# Altium PCB syspcb.PcbDoc (part 2 of 2)
Units mm, origin at the board's own origin, x right, y up, seen from the top; angles counter-clockwise.
Board outline 95.88 x 90.17 mm, 4 copper layers (TOP, GND, VCC, BOT), stack 0.778 mm thick; 67 components, 76 nets, 283 pads, 156 vias.
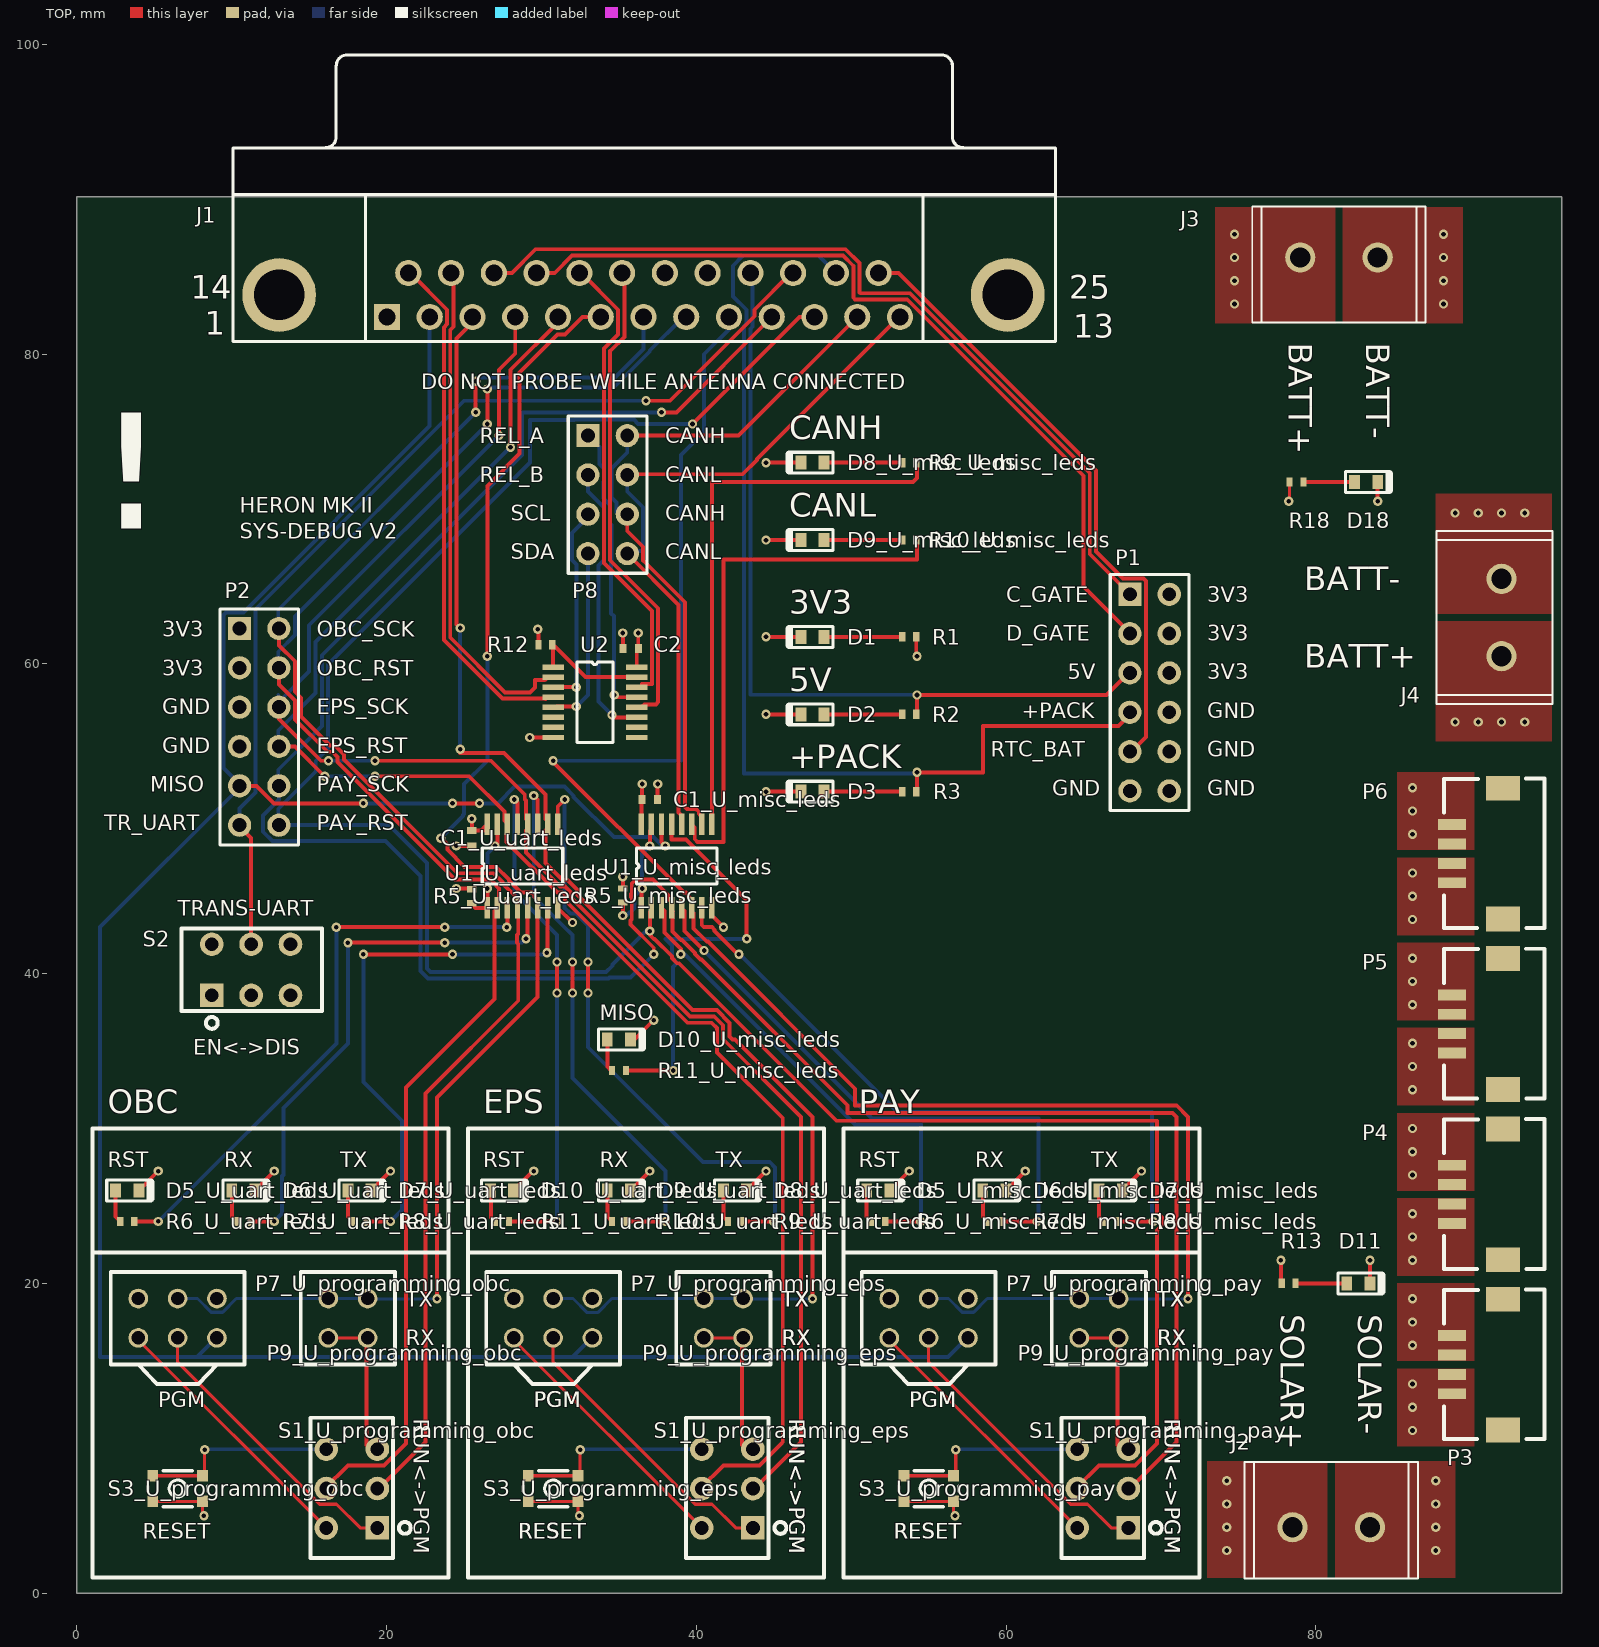
[diagram p0: TOP view]

## Silkscreen, mask and mechanical layers (free items; w line width, h text height) (continued)
Top Overlay: (continued)
  text "RX" at 45.5,15.998 h1
  text "RX" at 69.75,16 h1
  text "RX" at 69.75,16 h1
  text "RX" at 69.75,16 h1
  text "RX" at 69.75,16 h1
  text "PGM" at 5.25,12 h1
  text "PGM" at 29.5,11.998 h1
  text "PGM" at 29.5,11.998 h1
  text "PGM" at 29.5,11.998 h1
  text "PGM" at 29.5,11.998 h1
  text "PGM" at 29.5,11.998 h1
  text "PGM" at 53.75,12 h1
  text "PGM" at 53.75,12 h1
  text "PGM" at 53.75,12 h1
  text "PGM" at 53.75,12 h1
  text "RUN<->PGM" at 21.75,11.25 h1 r270
  text "RUN<->PGM" at 46,11.248 h1 r270
  text "RUN<->PGM" at 46,11.248 h1 r270
  text "RUN<->PGM" at 46,11.248 h1 r270
  text "RUN<->PGM" at 46,11.248 h1 r270
  text "RUN<->PGM" at 46,11.248 h1 r270
  text "RUN<->PGM" at 70.25,11.25 h1 r270
  text "RUN<->PGM" at 70.25,11.25 h1 r270
  text "RUN<->PGM" at 70.25,11.25 h1 r270
  text "RUN<->PGM" at 70.25,11.25 h1 r270
  text "RESET" at 4.25,3.5 h1
  text "RESET" at 28.5,3.498 h1
  text "RESET" at 28.5,3.498 h1
  text "RESET" at 28.5,3.498 h1
  text "RESET" at 28.5,3.498 h1
  text "RESET" at 28.5,3.498 h1
  text "RESET" at 52.75,3.5 h1
  text "RESET" at 52.75,3.5 h1
  text "RESET" at 52.75,3.5 h1
  text "RESET" at 52.75,3.5 h1
Route Tool Path:
  lines w0.254: 0,0 0,90.229 95.86,90.229 95.86,0 0,0

## Text inside footprints (layer, text, board x,y; h text height)
J1: Top Overlay "1" at 8.25,81.25 h1.5; Top Overlay "13" at 64.336,81.08 h1.5; Top Overlay "14" at 7.336,83.58 h1.5; Top Overlay "25" at 64.086,83.58 h1.5
J2: Mechanical 4 "1" at 77.35,1.6 h1.88; Mechanical 4 "1" at 77.35,1.6 h1.88
J3: Mechanical 4 "1" at 85.15,88.9 h1.88 r180; Mechanical 4 "1" at 85.15,88.9 h1.88 r180
J4: Mechanical 4 "1" at 94.65,59.35 h1.88 r90; Mechanical 4 "1" at 94.65,59.35 h1.88 r90